# Altium PCB PCB.PcbDoc
Units mm, origin at the board's own origin, x right, y up, seen from the top; angles counter-clockwise.
Board outline 152.4 x 101.6 mm, 2 copper layers (Top Layer, Bottom Layer); 5 components, 6 nets, 25 pads, 0 vias.
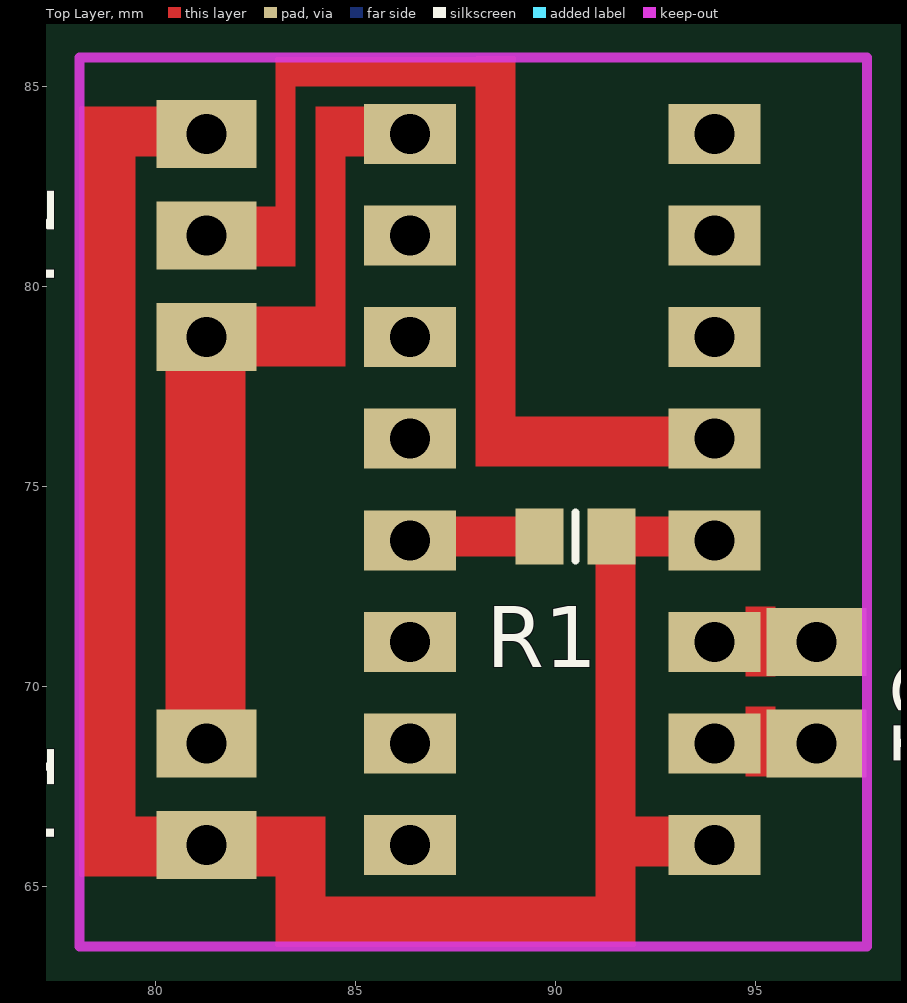
[diagram p0: Top Layer view]
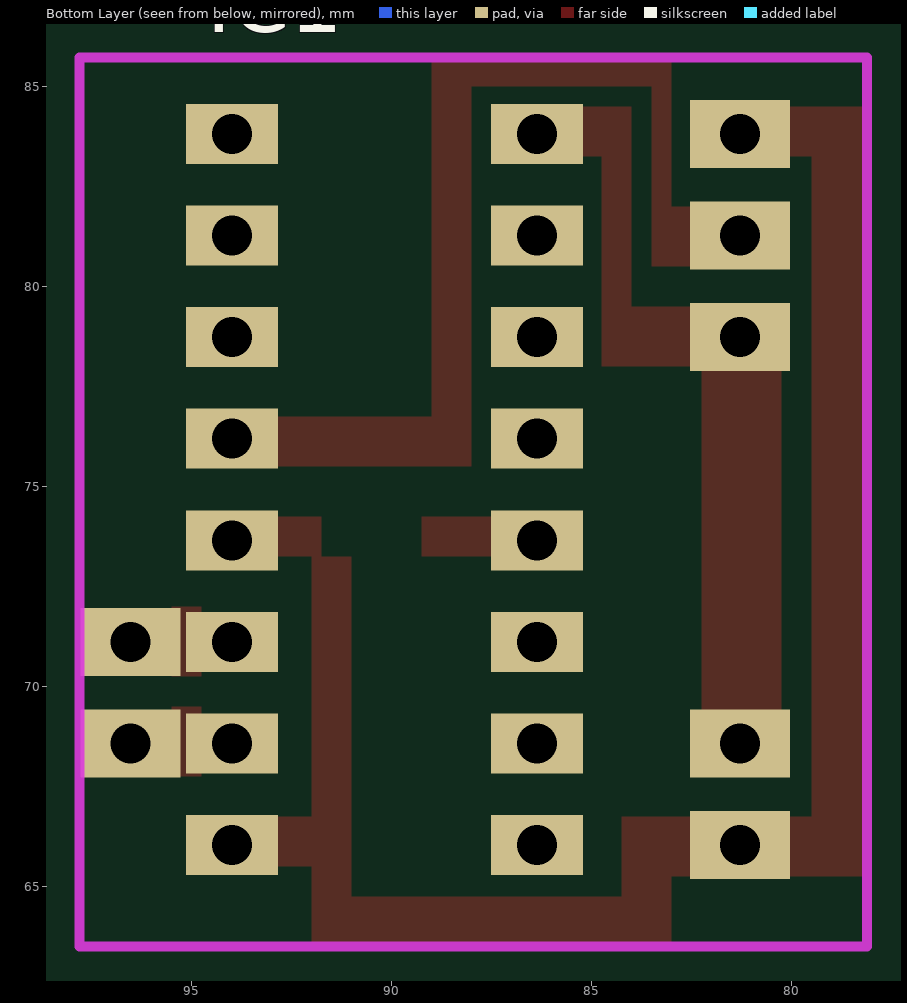
[diagram p1: Bottom Layer view, seen from below]

## Layer stack, top to bottom
Top Solder: solder mask 0.0102, Solder Resist, Dk 3.5
Top Layer: signal copper 0.0356
Dielectric 1: dielectric 0.32, FR-4, Dk 4.8
Bottom Layer: signal copper 0.0356
Bottom Solder: solder mask 0.0102, Solder Resist, Dk 3.5

## Board outline
25.4,25.4 177.8,25.4 177.8,127 25.4,127

## Design rules (kind name [scope] priority, off if disabled: settings)
Clearance [All] p1: gap=0.254
PolygonConnect [All] p1: connectstyle=Relief reliefconductorwidth=0.254 reliefentries=4 polygonreliefangle="90 Angle" airgapwidth=0.254
RoutingVias [All] p1: holewidth=0.711 width=1.27 viastyle="Through Hole" minholewidth=0.711 minwidth=1.27 maxholewidth=0.711 maxwidth=1.27
SolderMaskExpansion [All] p1: expansion=0.102
UnpouredPolygon [All] p1: allowunpoured=FALSE
Width [All] p1: maxlimit=0.254 minlimit=0.254 preferedwidth=0.254
29 further rules are at their usual default settings.

## Components (designator, comment, footprint, x,y, rotation, side; value= is the part's Value field where it differs from the comment)
C1 "Sensor area" "Header 2x1 long" 96.52,71.12 r270 top
IC1 "4046" DIP-16 91.44,76.2 r90 bottom
P1 "Power supply" "Header 2x1 long" 81.28,68.58 r270 top
P2 "Signal out" "Header 3x1 long" 81.28,78.74 r90 top
R1 "100K" "R 0805 / 2012" 90.5,73.75 r0 top

## Footprints (in the part's own frame and the unit in brackets; to place one, negate y for a bottom-side part, rotate by r counter-clockwise, add the part's x,y. Pads: shape width x height; smd on the part's side, far side on the other; paste and mask are expansions set on the pad)
DIP-16 [mm]
  rect 1.5x2.3 hole 1: 1(7.62,2.54) 2(5.08,2.54) 3(2.54,2.54) 4(0,2.54) 5(-2.54,2.54) 6(-5.08,2.54) 7(-7.62,2.54) 8(-10.16,2.54) 9(-10.16,-5.08) 10(-7.62,-5.08) 11(-5.08,-5.08) 12(-2.54,-5.08) 13(0,-5.08) 14(2.54,-5.08) 15(5.08,-5.08) 16(7.62,-5.08)
  body extent -11.02,-5.59 8.48,2.94, height 4.09
"Header 2x1 long" [mm] "2.54mm"
  rect 1.7x2.5 hole 1: 1(0,0) 2(2.54,0)
"Header 3x1 long" [mm] "2.54mm"
  rect 1.7x2.5 hole 1: 1(0,0) 2(2.54,0) 3(5.08,0)
"R 0805 / 2012" [mm] "Resistor 0805 / 2012 (2.0 x 1.2 mm)"
  rect 1.2x1.4 smd: 1(-0.9,0) 2(0.9,0)
  silkscreen extent 0,-0.6 0,0.6, body extent -1,-0.62 1,0.62, height 0.45

## Part data
C1 P1: library part "Header 2x1"
IC1: "PLL / VCO"
P2: library part "Header 1x3", "2.54mm"
R1: library part Resistor

## Nets (pads, with @x,y where several pads share a name; then routed paths per layer and width w, separated by ;. In a path a pad name is that pad's centre, name@x,y a point inside that pad or via, vN(x,y) a via of type N, cw(c..) or ccw(c..) an arc to the next point about the centre after c; other vN are vias at no path point)
GND: IC1.5 IC1.8 P1.2 P2.3 R1.2
NetC1_1: C1.1 IC1.6
NetC1_2: C1.2 IC1.7
NetIC1_4: IC1.4 P2.2
NetIC1_12: IC1.12 R1.1
VCC: IC1.16 P1.1 P2.1
pads on no net: IC1.1 IC1.2 IC1.3 IC1.9 IC1.10 IC1.11 IC1.13 IC1.14 IC1.15

## Keep-outs
Keep-Out Layer:
  lines w0.254: 78.105,63.5 78.105,85.725 97.79,85.725 97.79,63.5 78.105,63.5

## Other copper
Top Layer:
  rectangle net NetC1_2: 94.75,67.75 95.5,69.5
  rectangle net NetC1_1: 94.75,70.25 95.5,72
  rectangle net NetIC1_4: 83,82 83.5,85
  rectangle net NetIC1_4: 82.25,80.5 83.5,82
  rectangle net NetIC1_4: 83,85 88,85.725
  rectangle net NetIC1_4: 88,76.75 89,85.75
  rectangle net NetIC1_4: 88,75.5 93,76.75
  rectangle net VCC: 84,83.25 86.25,84.5
  rectangle net VCC: 84,79.5 84.75,83.25
  rectangle net VCC: 82.25,78 84.75,79.5
  rectangle net GND: 79.5,65.25 80.5,66.75
  rectangle net GND: 78.105,65.25 79.5,83.25
  rectangle net GND: 78.105,83.25 80.25,84.5
  rectangle net VCC: 80.25,69.25 82.25,78
  rectangle net GND: 91,64.75 92,65.5
  rectangle net GND: 84.25,63.5 92,64.75
  rectangle net GND: 83,63.5 84.25,65.25
  rectangle net GND: 81.28,65.25 84.25,66.75
  rectangle net GND: 91,65.5 92,73.25
  rectangle net GND: 91.75,65.5 93.5,66.75
  rectangle net GND: 91.75,73.25 93.5,74.25
  rectangle net NetIC1_12: 87.25,73.25 89.25,74.25